# EAGLE board 4ESC v3.1 (EAGLE 6.5.0), part 1 of 2
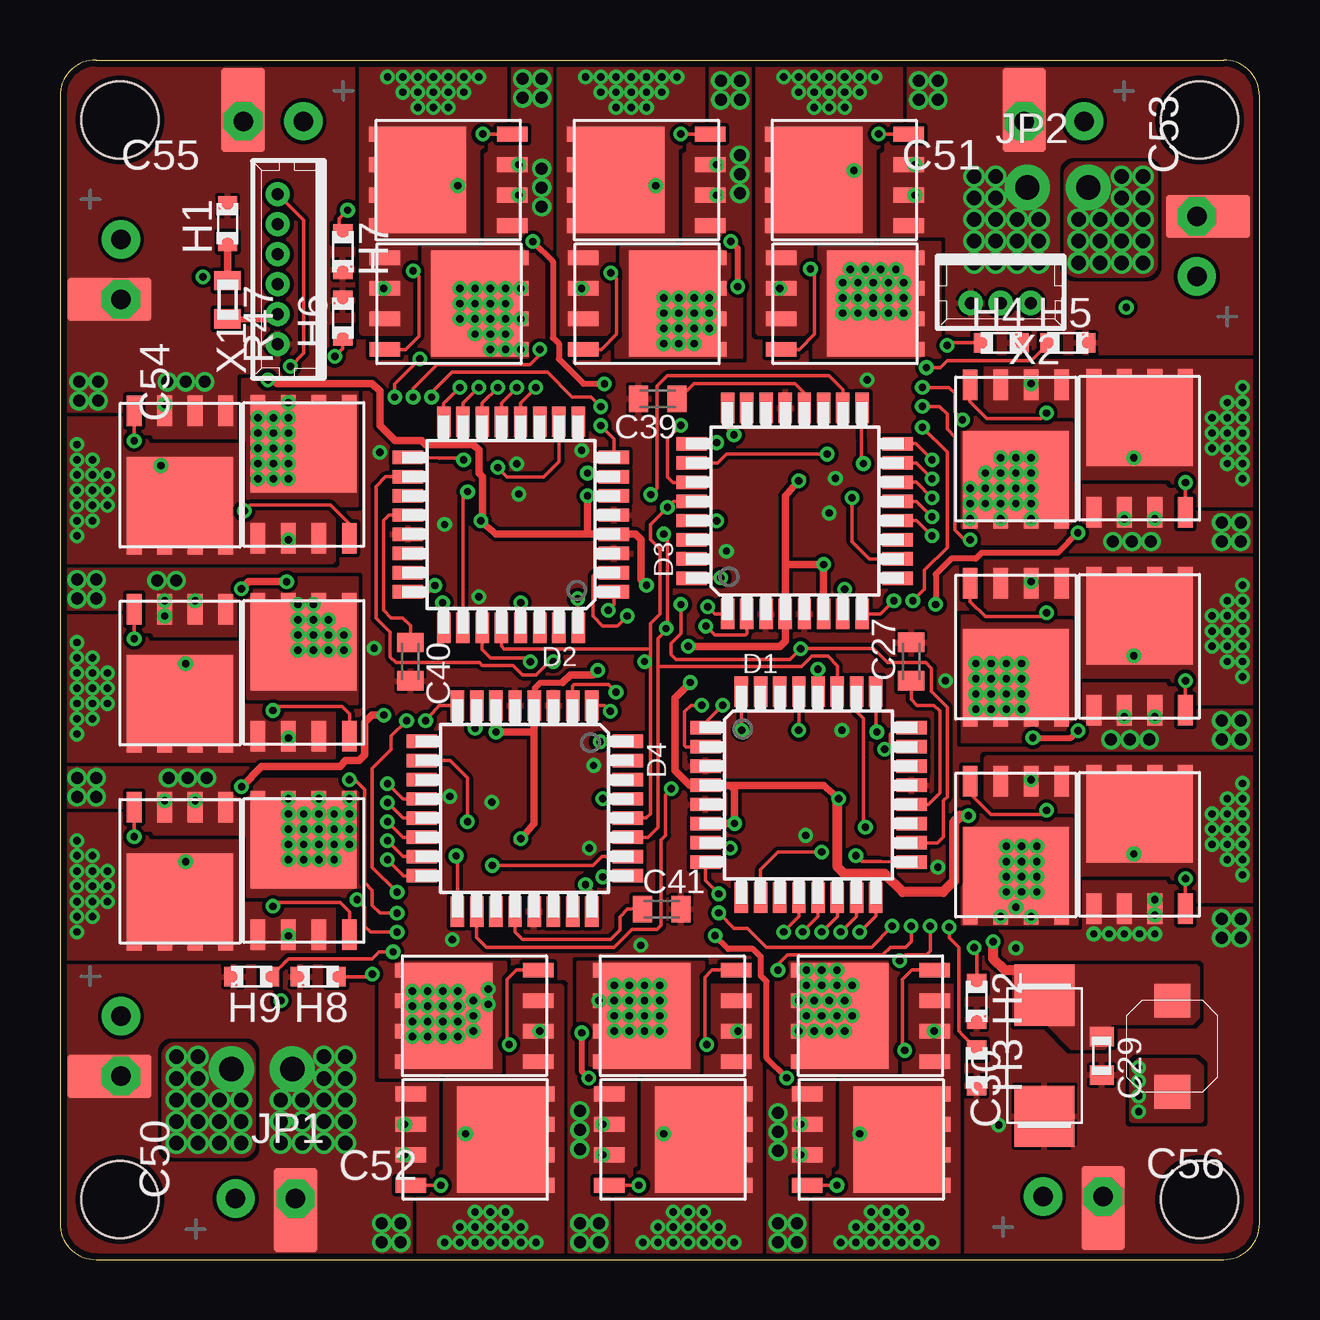
[diagram p0: board, top side]
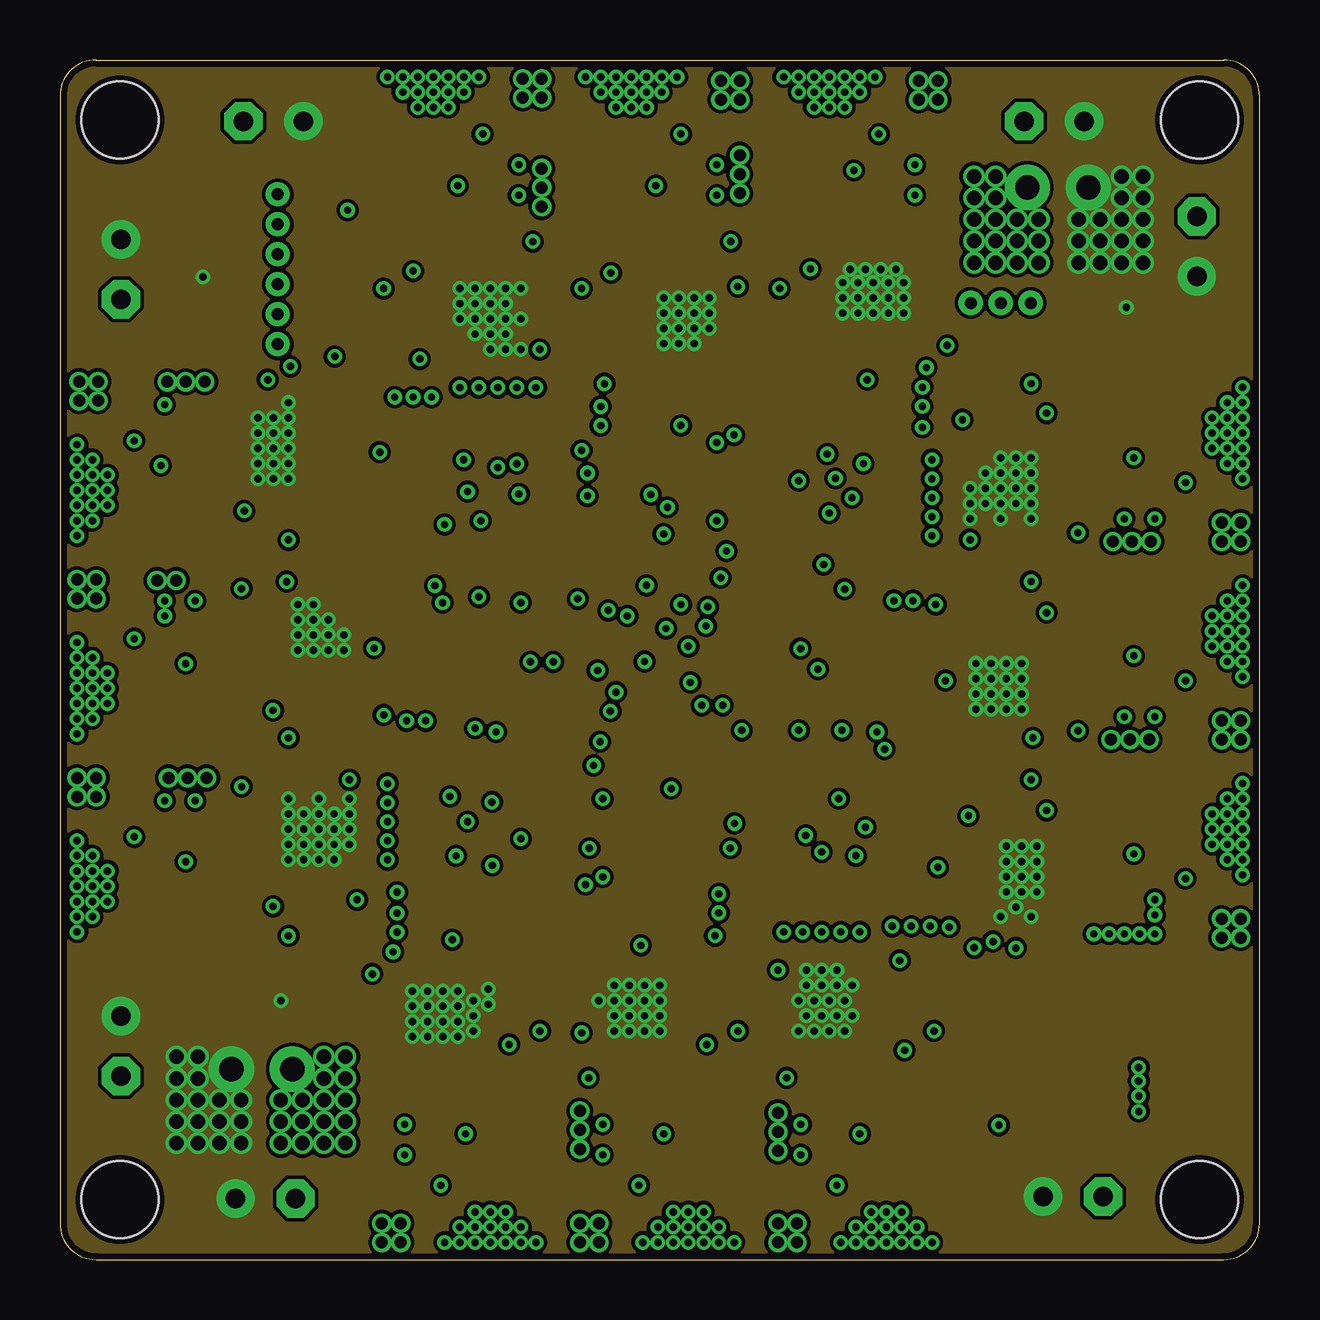
[diagram p1: board, inner layer Route2]
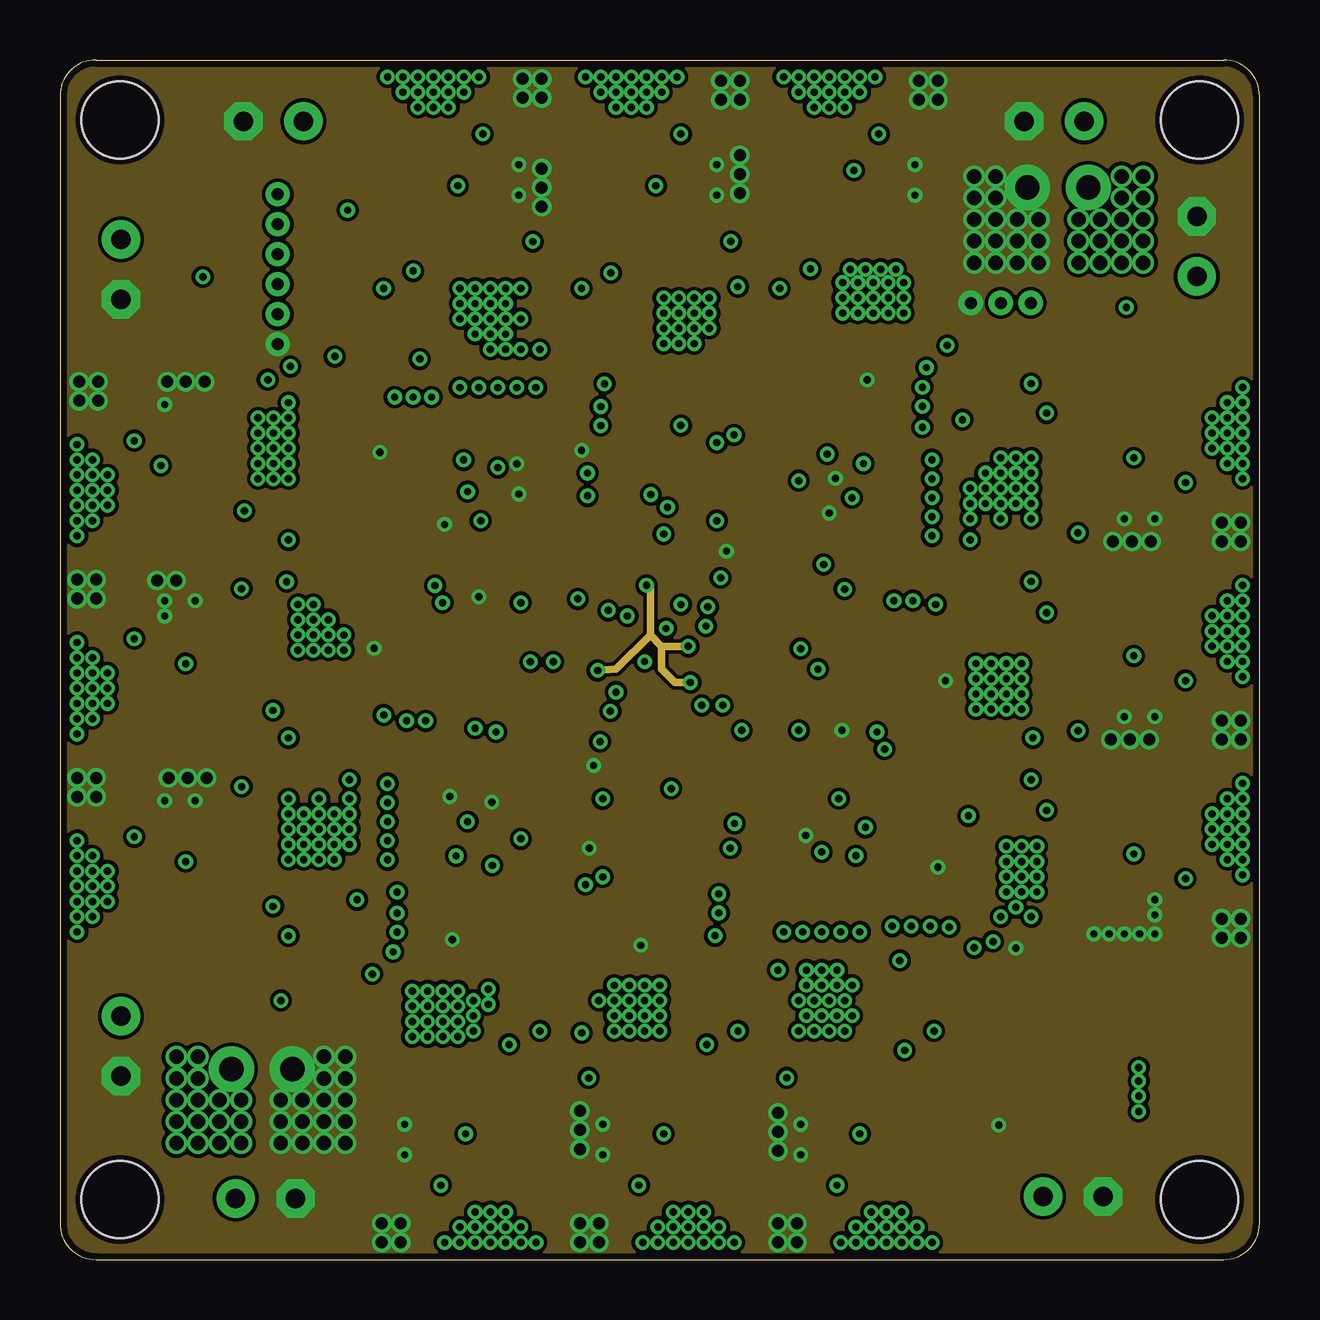
[diagram p2: board, inner layer Route15]
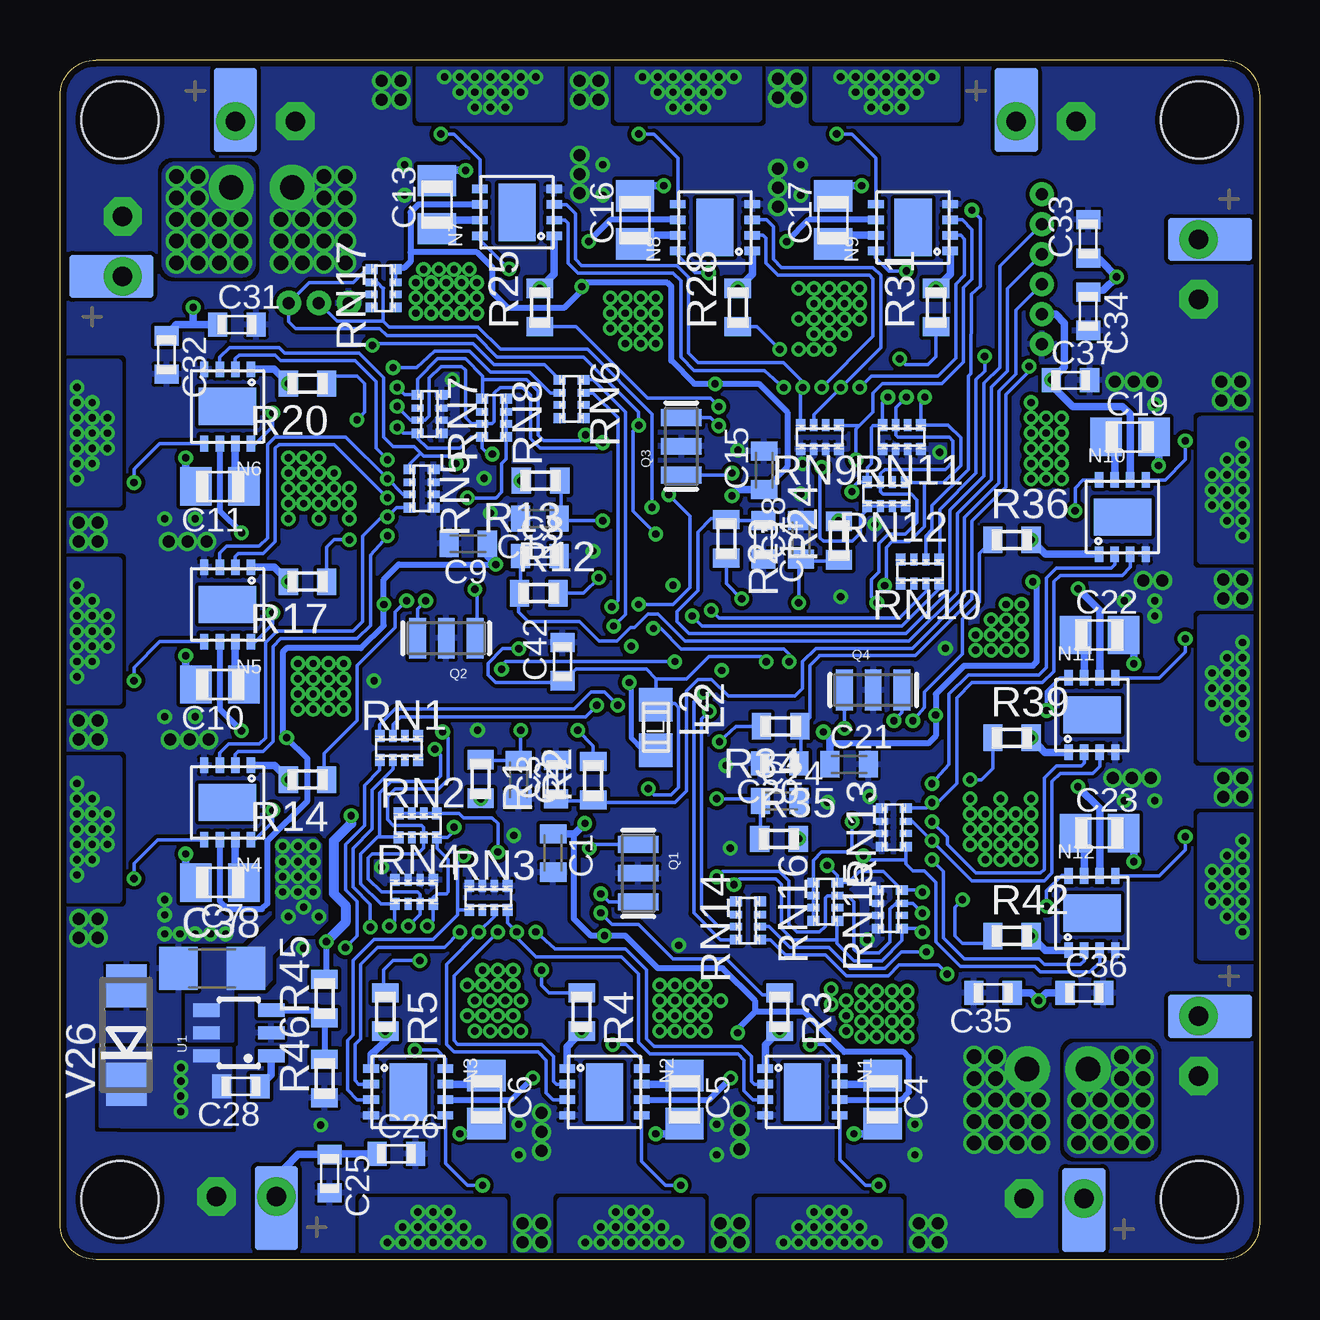
[diagram p3: board, bottom side, seen from below]

Size 50 x 50 mm. Coordinates in mm from the lower left corner, seen from the top.
Outline: 1.5,50 48.5,50 arc-90 50,48.5 50,1.5 arc-90 48.5,0 1.5,0 arc-90 0,1.5 0,48.5 arc-90 1.5,50
Copper layers (1*2*15*16): Top 0.035mm / dielectric 0.48mm / Route2 0.035mm / dielectric 0.48mm / Route15 0.035mm / dielectric 0.48mm / Bottom 0.035mm
Design rules "ITEADstudio_CAM for Eagle6_4Layer.x": minimum track width 6mil, minimum drill 12mil, track to track 6mil, track to pad 6mil, pad to pad 6mil, via to via 6mil, smd to smd 0mil, copper to edge 10mil, drill to drill 10mil, minimum pad ring 10mil, minimum via ring 6mil, stop-mask expansion 2mil, vias tented up to drill 100mil, thermal gap 0.125mm
Holes 3.2 mm at 2.5,2.5 2.5,47.5 47.5,2.5 47.5,47.5

## Footprints (pad centres in the part's own frame; a part is rotated, then mirrored left to right if it is on the bottom)
C0603K = smd 0.8 x 1.1: 1 -0.8,0; 2 0.8,0
C0603K' = smd 0.8 x 1: 1 -0.8,0; 2 0.8,0
C0805K = smd 1.3 x 1.6: 1 -1,0; 2 1,0
C/6032-28R = smd 2.55 x 2.5: + 2.525,0; - -2.525,0
C1206 = smd 1.6 x 1.8: 1 -1.4,0; 2 1.4,0
ELKO_MARTINEZ = drill 0.813 pad 1.6: + -1.25,1.27 | smd 1.8 x 3.5 bottom: +1 -1.25,0.8 | drill 0.813 pad 1.6 octagon: - 1.25,1.27 | smd 1.8 x 3.5: -1 1.25,0.8
TQFP32-08 = smd 1.27 x 0.559: 1 -4.293,2.8; 2 -4.293,2; 3 -4.293,1.2; 4 -4.293,0.4; 5 -4.293,-0.4; 6 -4.293,-1.2; 7 -4.293,-2; 8 -4.293,-2.8; 17 4.293,-2.8; 18 4.293,-2; 19 4.293,-1.2; 20 4.293,-0.4; 21 4.293,0.4; 22 4.293,1.2; 23 4.293,2; 24 4.293,2.8 | smd 0.559 x 1.27: 9 -2.8,-4.293; 10 -2,-4.293; 11 -1.2,-4.293; 12 -0.4,-4.293; 13 0.4,-4.293; 14 1.2,-4.293; 15 2,-4.293; 16 2.8,-4.293; 25 2.8,4.293; 26 2,4.293; 27 1.2,4.293; 28 0.4,4.293; 29 -0.4,4.293; 30 -1.2,4.293; 31 -2,4.293; 32 -2.8,4.293
CHIPLED_0603 = smd 0.8 x 0.8: A 0,-0.75; C 0,0.75
1X02_NO_SILK = drill 1.016 pad 1.88: 1 0,0; 2 2.54,0
CDRH4D28 = smd 1.4 x 1.5: P$1 -1.9,0; P$2 1.9,0
L0805 = smd 1.397 x 1.397: 1 -0.953,0; 2 0.953,0
DFN3X3P8 = smd 0.35 x 0.65: 1 -0.975,-1.55; 2 -0.325,-1.55; 3 0.325,-1.55; 4 0.975,-1.55; 5 0.975,1.55; 6 0.325,1.55; 7 -0.325,1.55; 8 -0.975,1.55 | smd 2.4 x 1.55: 9 0,0
RESONATOR-SMD = smd 0.7 x 1.7: 1 -1.2,0; 2 0,0; 3 1.2,0
R0603 = smd 0.8 x 1.1: 1 -0.8,0; 2 0.8,0
4X0402ARV341 = smd 0.4 x 0.5: 1 -0.8,-0.5; 4 0.8,-0.5; 5 0.8,0.5; 8 -0.8,0.5 | smd 0.3 x 0.5: 2 -0.25,-0.5; 3 0.25,-0.5; 6 0.25,0.5; 7 -0.25,0.5
SOT23-6 = smd 0.55 x 1.1: 1 -0.95,-1.35; 2 0,-1.35; 3 0.95,-1.35; 4 0.95,1.35; 5 0,1.35; 6 -0.95,1.35
POWER56 = smd 0.61 x 1.27: P$1 -1.905,-2.67; P$2 -0.635,-2.67; P$3 0.635,-2.67; P$4 1.905,-2.67; P$5 1.905,2.67; P$6 0.635,2.67; P$7 -0.635,2.67; P$8 -1.905,2.67 | smd 4.423 x 3.7: P$9 0,1.1
DO214AC = smd 1.8 x 1.7: A 2.05,0; C -2.05,0
53047-06 = drill 0.5 pad 0.698: 1 3.125,0.45; 2 1.875,0.45; 3 0.625,0.45; 4 -0.625,0.45; 5 -1.875,0.45; 6 -3.125,0.45
53047-03 = drill 0.5 pad 0.698: 1 1.25,0.45; 2 0,0.45; 3 -1.25,0.45

## Placement (x,y rotation side)
C1  100n  [C0603K]  29.45,16.94 270 bottom
C2  100n  [C0603K]  30.89,20 270 bottom
C3  470p  [C0603K']  29.33,20 90 bottom
C4  1u50V  [C0805K]  15.71,6.67 270 bottom
C5  1u50V  [C0805K]  23.97,6.67 270 bottom
C6  1u50V  [C0805K]  32.22,6.67 270 bottom
C7  1u50V  [C0805K]  43.33,15.71 180 bottom
C8  470p  [C0603K']  30,29.33 0 bottom
C9  100n  [C0603K]  32.99,29.84 180 bottom
C10  1u50V  [C0805K]  43.33,23.97 180 bottom
C11  1u50V  [C0805K]  43.33,32.22 180 bottom
C12  100n  [C0603K]  30,30.89 180 bottom
C13  1u50V  [C0805K]  34.29,43.97 90 bottom
C14  470p  [C0603K']  20.67,30 270 bottom
C15  100n  [C0603K]  20.65,32.9 90 bottom
C16  1u50V  [C0805K]  26.03,43.33 90 bottom
C17  1u50V  [C0805K]  17.78,43.33 90 bottom
C18  100n  [C0603K]  19.11,30 90 bottom
C19  1u50V  [C0805K]  5.4,34.29 0 bottom
C20  470p  [C0603K']  20,20.67 180 bottom
C21  100n  [C0603K]  17.11,20.64 0 bottom
C22  1u50V  [C0805K]  6.67,26.03 0 bottom
C23  1u50V  [C0805K]  6.67,17.78 0 bottom
C24  100n  [C0603K]  20,19.11 0 bottom
C25  100n  [C0603K']  38.76,3.58 270 bottom
C26  100n  [C0603K']  35.98,4.41 0 bottom
C27  100n  [C0603K]  35.48,24.93 90 top
C28  100n  [C0603K']  42.47,7.22 180 bottom
C29  100n  [C0603K']  43.42,8.49 270 top
C30  47u 10V  [C/6032-28R]  41.04,8.49 90 top
C31  100n  [C0603K']  42.62,38.97 0 bottom
C32  100n  [C0603K']  45.56,37.7 270 bottom
C33  100n  [C0603K']  7.14,42.55 90 bottom
C34  100n  [C0603K']  7.14,39.53 270 bottom
C35  100n  [C0603K']  11.11,11.11 180 bottom
C36  100n  [C0603K']  7.3,11.11 0 bottom
C37  100n  [C0603K']  7.88,36.65 0 bottom
C38  100n  [C1206]  43.66,12.14 0 bottom
C39  100n  [C0603K]  24.92,35.88 180 top
C40  100n  [C0603K]  14.61,24.92 270 top
C41  100n  [C0603K]  25.08,14.61 0 top
C42  100n  [C0603K']  29.05,24.92 90 bottom
C50  150µ35V1  [ELKO_MARTINEZ]  1.27,8.89 270 top
C51  150µ35V1  [ELKO_MARTINEZ]  41.43,48.72 180 top
C52  150µ35V1  [ELKO_MARTINEZ]  8.57,1.27 0 top
C53  150µ35V1  [ELKO_MARTINEZ]  48.66,42.23 90 top
C54  150µ35V1  [ELKO_MARTINEZ]  1.27,41.27 270 top
C55  150µ35V1  [ELKO_MARTINEZ]  8.89,48.72 180 top
C56  150µ35V1  [ELKO_MARTINEZ]  42.23,1.35 0 top
D1  MEGA8-AI  [TQFP32-08]  31.2,19.37 0 top
D2  MEGA8-AI  [TQFP32-08]  18.8,30.63 180 top
D3  MEGA8-AI  [TQFP32-08]  30.63,31.2 90 top
D4  MEGA8-AI  [TQFP32-08]  19.37,18.8 270 top
H1  blue  [CHIPLED_0603]  6.99,43.18 0 top
H2  GREEN  [CHIPLED_0603]  38.21,10.76 180 top
H3  RED  [CHIPLED_0603]  38.21,7.99 180 top
H4  GREEN  [CHIPLED_0603]  39.24,38.21 270 top
H5  RED  [CHIPLED_0603]  42.02,38.21 270 top
H6  GREEN  [CHIPLED_0603]  11.79,39.24 0 top
H7  RED  [CHIPLED_0603]  11.79,42.02 180 top
H8  GREEN  [CHIPLED_0603]  10.76,11.79 90 top
H9  RED  [CHIPLED_0603]  7.99,11.79 90 top
JP1  [1X02_NO_SILK]  9.68,7.94 180 top
JP2  [1X02_NO_SILK]  40.32,44.69 0 top
L1  15uH 1A  [CDRH4D28]  46.35,8.89 90 top
L2  4.7uH  [L0805]  25.16,22.18 270 bottom
N1  MCP14700  [DFN3X3P8]  19.05,6.99 270 bottom
N2  MCP14700  [DFN3X3P8]  27.3,6.99 270 bottom
N3  MCP14700  [DFN3X3P8]  35.48,6.99 270 bottom
N4  MCP14700  [DFN3X3P8]  43.02,19.05 180 bottom
N5  MCP14700  [DFN3X3P8]  43.02,27.3 180 bottom
N6  MCP14700  [DFN3X3P8]  43.02,35.56 180 bottom
N7  MCP14700  [DFN3X3P8]  30.95,43.65 90 bottom
N8  MCP14700  [DFN3X3P8]  22.7,43.02 90 bottom
N9  MCP14700  [DFN3X3P8]  14.44,43.02 90 bottom
N10  MCP14700  [DFN3X3P8]  5.71,30.95 0 bottom
N11  MCP14700  [DFN3X3P8]  6.99,22.7 0 bottom
N12  MCP14700  [DFN3X3P8]  6.99,14.44 0 bottom
Q1  16mhz  [RESONATOR-SMD]  25.9,16.1 270 bottom
Q2  16mhz  [RESONATOR-SMD]  33.9,25.9 180 bottom
Q3  16mhz  [RESONATOR-SMD]  24.1,33.9 90 bottom
Q4  16mhz  [RESONATOR-SMD]  16.1,23.74 0 bottom
R1  10k  [R0603]  32.47,20.03 270 bottom
R2  220R  [R0603]  27.78,19.96 90 bottom
R3  18k  [R0603]  20,10.32 270 bottom
R4  18k  [R0603]  28.26,10.32 270 bottom
R5  18k  [R0603]  36.44,10.32 270 bottom
R12  220R  [R0603]  30.04,27.78 0 bottom
R13  10k  [R0603]  29.97,32.47 180 bottom
R14  18k  [R0603]  39.68,20 180 bottom
R17  18k  [R0603]  39.68,28.26 180 bottom
R20  18k  [R0603]  39.68,36.51 180 bottom
R23  220R  [R0603]  22.22,30.04 270 bottom
R24  10k  [R0603]  17.53,29.97 90 bottom
R25  18k  [R0603]  30,39.68 90 bottom
R28  18k  [R0603]  21.74,39.68 90 bottom
R31  18k  [R0603]  13.49,39.68 90 bottom
R34  220R  [R0603]  19.96,22.22 180 bottom
R35  10k  [R0603]  20.03,17.53 0 bottom
R36  18k  [R0603]  10.32,30 0 bottom
R39  18k  [R0603]  10.32,21.74 0 bottom
R42  18k  [R0603]  10.32,13.49 0 bottom
R45  5k6  [R0603]  38.97,10.87 90 bottom
R46  1k  [R0603]  38.97,7.54 90 bottom
R47  330R  [R0603]  6.99,40.01 270 top
RN1  560R  [4X0402ARV341]  35.87,21.33 180 bottom
RN2  3k3  [4X0402ARV341]  35.08,18.1 180 bottom
RN3  10k  [4X0402ARV341]  32.15,15.08 180 bottom
RN4  3k3  [4X0402ARV341]  35.24,15.32 180 bottom
RN5  10k  [4X0402ARV341]  34.92,32.15 90 bottom
RN6  560R  [4X0402ARV341]  28.67,35.87 90 bottom
RN7  3k3  [4X0402ARV341]  34.6,35.24 90 bottom
RN8  3k3  [4X0402ARV341]  31.9,35.08 90 bottom
RN9  10k  [4X0402ARV341]  18.33,34.28 0 bottom
RN10  560R  [4X0402ARV341]  14.15,28.67 0 bottom
RN11  3k3  [4X0402ARV341]  14.92,34.28 0 bottom
RN12  3k3  [4X0402ARV341]  15.55,31.9 0 bottom
RN13  10k  [4X0402ARV341]  15.24,18.01 270 bottom
RN14  560R  [4X0402ARV341]  21.33,14.13 270 bottom
RN15  3k3  [4X0402ARV341]  15.4,14.6 270 bottom
RN16  3k3  [4X0402ARV341]  18.1,14.92 270 bottom
RN17  10k  [4X0402ARV341]  36.51,40.48 270 bottom
U1  LM2842  [SOT23-6]  42.55,9.45 90 bottom
U$1  M  [M]  24.92,26.75 0 top
U$2  M  [M]  27.78,4.13 0 bottom
U$3  4ESC_05MM  [4ESC_05MM_HOCH]  49.21,8.73 90 top
U$4  4ESC_05MM  [4ESC_05MM_HOCH]  20.32,3.49 0 bottom
V1  FDMS7660  [POWER56]  17.27,10.16 90 top
V2  FDMS7660  [POWER56]  17.3,5 270 top
V3  FDMS7660  [POWER56]  25.53,10.16 90 top
V4  FDMS7660  [POWER56]  25.56,5 270 top
V5  FDMS7660  [POWER56]  33.78,10.16 90 top
V6  FDMS7660  [POWER56]  33.81,5 270 top
V7  FDMS7660  [POWER56]  39.84,17.27 180 top
V8  FDMS7660  [POWER56]  45,17.3 0 top
V9  FDMS7660  [POWER56]  39.84,25.53 180 top
V10  FDMS7660  [POWER56]  45,25.56 0 top
V11  FDMS7660  [POWER56]  39.84,33.78 180 top
V12  FDMS7660  [POWER56]  45,33.81 0 top
V13  FDMS7660  [POWER56]  32.73,39.84 270 top
V14  FDMS7660  [POWER56]  32.7,45 90 top
V15  FDMS7660  [POWER56]  24.47,39.84 270 top
V16  FDMS7660  [POWER56]  24.44,45 90 top
V17  FDMS7660  [POWER56]  16.22,39.84 270 top
V18  FDMS7660  [POWER56]  16.19,45 90 top
V19  FDMS7660  [POWER56]  10.16,32.73 0 top
V20  FDMS7660  [POWER56]  5,32.7 180 top
V21  FDMS7660  [POWER56]  10.16,24.47 0 top
V22  FDMS7660  [POWER56]  5,24.44 180 top
V23  FDMS7660  [POWER56]  10.16,16.22 0 top
V24  FDMS7660  [POWER56]  5,16.19 180 top
V26  SS14  [DO214AC]  47.23,9.36 90 bottom
X1  53047-06  [53047-06]  9.53,41.27 90 top
X2  53047-03  [53047-03]  39.21,40.32 180 top

## Library data of the parts
C1 C2 C9 C12 C15 C18 C21 C24 C27 C39-C41 R1-R5 R12-R14 R17 R20 R23-R25 R28 R31 R34-R36 R39 R42 = resistor
C3-C8 C10 C11 C13 C14 C16 C17 C19 C20 C22 C23 C25 C26 C28-C38 C42 C50-C56 R45-R47 = rcl
D1-D4 = atmel; MPN: ATMEGA8-16AU; OC_FARNELL: 9171371; OC_NEWARK: 73M8863
H1-H9 = led
JP1 JP2 Q1-Q4 V1-V24 = SparkFun
L1 = spulen-martinez
L2 = divers
N1-N12 = microchip
RN1-RN17 = resistor-dil; OC_FARNELL: unknown; OC_NEWARK: unknown
U1 = texas
U$1-U$4 = Zeichen
V26 = diode
X1 = con-molex; MPN: 53047-0610-C; OC_FARNELL: 9733078; OC_NEWARK: 03M2965
X2 = con-molex; MPN: 530470310; OC_FARNELL: 9732853; OC_NEWARK: 14R5412

## Nets
+5V: C1.1 C9.1 C15.1 C21.1 C29.1 C30.+ C37.1 D1.4 D1.6 D2.4 D2.6 D3.4 D3.6 D4.4 D4.6 L1.P$2 L2.2 N1.6 N2.6 N3.6 N4.6 N5.6 N6.6 N7.6 N8.6 N9.6 N10.6 N11.6 N12.6 R1.2 R13.2 R24.2 R35.2 R45.2 R47.2 RN17.7 RN17.8 X1.5
A+_1: D1.12 N1.2
A+_2: D3.12 N4.2
A+_3: D2.12 N7.2
A+_4: D4.12 N10.2
A-_1: D1.13 N1.3 RN3.8
A-_2: D3.13 N4.3 RN5.8
A-_3: D2.13 N7.3 RN9.8
A-_4: D4.13 N10.3 RN13.8
A_5V: C42.1 D1.18 D2.18 D3.18 D4.18 L2.1
B+_1: D1.14 N2.2
B+_2: D3.14 N5.2
B+_3: D2.14 N8.2
B+_4: D4.14 N11.2
B-_1: D1.15 N2.3 RN3.7
B-_2: D3.15 N5.3 RN5.7
B-_3: D2.15 N8.3 RN9.7
B-_4: D4.15 N11.3 RN13.7
C+_1: D1.16 N3.2
C+_2: D3.16 N6.2
C+_3: D2.16 N9.2
C+_4: D4.16 N12.2
C-_1: D1.17 N3.3 RN3.5
C-_2: D3.17 N6.3 RN5.5
C-_3: D2.17 N9.3 RN9.5
C-_4: D4.17 N12.3 RN13.5
GND: C1.2 C2.2 C3.2 C8.2 C9.2 C12.2 C14.2 C15.2 C18.2 C20.2 C21.2 C24.2 C25.2 C26.2 C27.2 C29.2 C30.- C31.2 C32.2 C33.2 C34.2 C35.2 C36.2 C37.2 C38.1 C39.2 C40.2 C41.2 C42.2 C50.- C50.-1 C51.- C51.-1 C52.- C52.-1 C53.- C53.-1 C54.- C54.-1 C55.- C55.-1 C56.- C56.-1 D1.3 D1.5 D1.21 D2.3 D2.5 D2.21 D3.3 D3.5 D3.21 D4.3 D4.5 D4.21 H1.C H2.C H3.C H4.C H5.C H6.C H7.C H8.C H9.C JP1.1 JP2.1 N1.4 N2.4 N3.4 N4.4 N5.4 N6.4 N7.4 N8.4 N9.4 N10.4 N11.4 N12.4 Q1.2 Q2.2 Q3.2 Q4.2 R46.1 RN3.1 RN3.2 RN3.3 RN3.4 RN4.1 RN4.2 RN4.3 RN4.4 RN5.1 RN5.2 RN5.3 RN5.4 RN7.1 RN7.2 RN7.3 RN7.4 RN9.1 RN9.2 RN9.3 RN9.4 RN11.1 RN11.2 RN11.3 RN11.4 RN13.1 RN13.2 RN13.3 RN13.4 RN15.1 RN15.2 RN15.3 RN15.4 U1.2 V2.P$1 V2.P$2 V2.P$3 V4.P$1 V4.P$2 V4.P$3 V6.P$1 V6.P$2 V6.P$3 V8.P$1 V8.P$2 V8.P$3 V10.P$1 V10.P$2 V10.P$3 V12.P$1 V12.P$2 V12.P$3 V14.P$1 V14.P$2 V14.P$3 V16.P$1 V16.P$2 V16.P$3 V18.P$1 V18.P$2 V18.P$3 V20.P$1 V20.P$2 V20.P$3 V22.P$1 V22.P$2 V22.P$3 V24.P$1 V24.P$2 V24.P$3 V26.A X1.6 X2.1
GREEN_LED_1: D1.2 RN1.4
GREEN_LED_2: D3.2 RN6.4
GREEN_LED_3: D2.2 RN10.4
GREEN_LED_4: D4.2 RN14.4
MOTOR-A_1: C4.2 N1.1 R3.2 V1.P$1 V1.P$2 V1.P$3 V2.P$5 V2.P$6 V2.P$7 V2.P$8 V2.P$9
MOTOR-A_2: C7.2 N4.1 R14.2 V7.P$1 V7.P$2 V7.P$3 V8.P$5 V8.P$6 V8.P$7 V8.P$8 V8.P$9
MOTOR-A_3: C13.2 N7.1 R25.2 V13.P$1 V13.P$2 V13.P$3 V14.P$5 V14.P$6 V14.P$7 V14.P$8 V14.P$9
MOTOR-A_4: C19.2 N10.1 R36.2 V19.P$1 V19.P$2 V19.P$3 V20.P$5 V20.P$6 V20.P$7 V20.P$8 V20.P$9
MOTOR-B_1: C5.2 N2.1 R4.2 V3.P$1 V3.P$2 V3.P$3 V4.P$5 V4.P$6 V4.P$7 V4.P$8 V4.P$9
MOTOR-B_2: C10.2 N5.1 R17.2 V9.P$1 V9.P$2 V9.P$3 V10.P$5 V10.P$6 V10.P$7 V10.P$8 V10.P$9
MOTOR-B_3: C16.2 N8.1 R28.2 V15.P$1 V15.P$2 V15.P$3 V16.P$5 V16.P$6 V16.P$7 V16.P$8 V16.P$9
MOTOR-B_4: C22.2 N11.1 R39.2 V21.P$1 V21.P$2 V21.P$3 V22.P$5 V22.P$6 V22.P$7 V22.P$8 V22.P$9
MOTOR-C_1: C6.2 N3.1 R5.2 V5.P$1 V5.P$2 V5.P$3 V6.P$5 V6.P$6 V6.P$7 V6.P$8 V6.P$9
MOTOR-C_2: C11.2 N6.1 R20.2 V11.P$1 V11.P$2 V11.P$3 V12.P$5 V12.P$6 V12.P$7 V12.P$8 V12.P$9
MOTOR-C_3: C17.2 N9.1 R31.2 V17.P$1 V17.P$2 V17.P$3 V18.P$5 V18.P$6 V18.P$7 V18.P$8 V18.P$9
MOTOR-C_4: C23.2 N12.1 R42.2 V23.P$1 V23.P$2 V23.P$3 V24.P$5 V24.P$6 V24.P$7 V24.P$8 V24.P$9
MUXA_1: D1.26 R3.1 RN2.8 RN4.8
MUXA_2: D3.26 R14.1 RN7.8 RN8.8
MUXA_3: D2.26 R25.1 RN11.8 RN12.8
MUXA_4: D4.26 R36.1 RN15.8 RN16.8
MUXB_1: D1.25 R4.1 RN2.7 RN4.7
MUXB_2: D3.25 R17.1 RN7.7 RN8.7
MUXB_3: D2.25 R28.1 RN11.7 RN12.7
MUXB_4: D4.25 R39.1 RN15.7 RN16.7
MUXC_1: D1.24 R5.1 RN2.5 RN4.5
MUXC_2: D3.24 R20.1 RN7.5 RN8.5
MUXC_3: D2.24 R31.1 RN11.5 RN12.5
MUXC_4: D4.24 R42.1 RN15.5 RN16.5
N$1: N1.5 V2.P$4
N$2: N2.5 V4.P$4
N$2_1: D1.8 Q1.3
N$2_2: D3.8 Q2.3
N$2_3: D2.8 Q3.3
N$2_4: D4.8 Q4.3
N$3: N3.5 V6.P$4
N$3_1: D1.7 Q1.1
N$3_2: D3.7 Q2.1
N$3_3: D2.7 Q3.1
N$3_4: D4.7 Q4.1
N$4: H3.A RN1.6
N$5: H2.A RN1.5
N$6: N4.5 V8.P$4
N$7: C40.1 D2.20
N$8: C27.1 D1.20
N$9: N5.5 V10.P$4
N$10: D1.9
N$11: D1.23
N$12: D1.22
N$13: D1.19
N$14: N6.5 V12.P$4
N$15: D1.30
N$16: H4.A RN6.5
N$16_1: N1.8 V1.P$4
N$16_2: N2.8 V3.P$4
N$16_3: N3.8 V5.P$4
N$16_4: N4.8 V7.P$4
N$16_5: N5.8 V9.P$4
N$16_6: N6.8 V11.P$4
N$16_7: N7.8 V13.P$4
N$16_8: N8.8 V15.P$4
N$16_9: N9.8 V17.P$4
N$16_10: N10.8 V19.P$4
N$16_11: N11.8 V21.P$4
N$16_12: N12.8 V23.P$4
N$17: C39.1 D3.20
N$18: D1.31
N$19: D1.11
N$20: C28.2 L1.P$1 U1.6 V26.C
N$21: D3.9
N$22: D3.23
N$23: D3.22
N$24: D3.19
N$25: D3.30
N$26: D3.31
N$27: D3.11
N$28: H5.A RN6.6
N$29: N7.5 V14.P$4
N$30: N8.5 V16.P$4
N$31: N9.5 V18.P$4
N$32: H6.A RN10.5
N$33: C41.1 D4.20
N$34: C28.1 U1.1
N$35: D2.9
N$36: D2.23
N$37: D2.22
N$38: D2.19
N$39: D2.30
N$40: D2.31
N$41: D2.11
N$42: H7.A RN10.6
N$43: N10.5 V20.P$4
N$44: N11.5 V22.P$4
N$45: N12.5 V24.P$4
N$46: H8.A RN14.5
N$47: R45.1 R46.2 U1.3
N$49: D4.9
N$50: D4.23
N$51: D4.22
N$52: D4.19
N$53: D4.30
N$54: D4.31
N$55: D4.11
N$56: H9.A RN14.6
N$60: H1.A R47.1
N$78_1: C4.1 N1.7
N$78_2: C5.1 N2.7
N$78_3: C6.1 N3.7
N$78_4: C7.1 N4.7
N$78_5: C10.1 N5.7
N$78_6: C11.1 N6.7
N$78_7: C13.1 N7.7
N$78_8: C16.1 N8.7
N$78_9: C17.1 N9.7
N$78_10: C19.1 N10.7
N$78_11: C22.1 N11.7
N$78_12: C23.1 N12.7
PWM_IN_1: C3.1 R2.1 X1.4
PWM_IN_2: C8.1 R12.1 X1.3
PWM_IN_3: C14.1 R23.1 X1.2
PWM_IN_4: C20.1 R34.1 X1.1
RC_IN_1: D1.32 R2.2
RC_IN_2: D3.32 R12.2
RC_IN_3: D2.32 R23.2
RC_IN_4: D4.32 R34.2
RED_LED_1: D1.1 RN1.3
RED_LED_2: D3.1 RN6.3
RED_LED_3: D2.1 RN10.3
RED_LED_4: D4.1 RN14.3
RST_1: C2.1 D1.29 R1.1
RST_2: C12.1 D3.29 R13.1
RST_3: C18.1 D2.29 R24.1
RST_4: C24.1 D4.29 R35.1
SCL: D1.28 D2.28 D3.28 D4.28 RN17.2 X2.2
SDA: D1.27 D2.27 D3.27 D4.27 RN17.1 X2.3
SENSE_STAR_1: D1.10 RN2.1 RN2.2 RN2.3 RN2.4
SENSE_STAR_2: D3.10 RN8.1 RN8.2 RN8.3 RN8.4
SENSE_STAR_3: D2.10 RN12.1 RN12.2 RN12.3 RN12.4
SENSE_STAR_4: D4.10 RN16.1 RN16.2 RN16.3 RN16.4
VCC: C25.1 C26.1 C31.1 C32.1 C33.1 C34.1 C35.1 C36.1 C38.2 C50.+ C50.+1 C51.+ C51.+1 C52.+ C52.+1 C53.+ C53.+1 C54.+ C54.+1 C55.+ C55.+1 C56.+ C56.+1 JP1.2 JP2.2 U1.4 U1.5 V1.P$5 V1.P$6 V1.P$7 V1.P$8 V1.P$9 V3.P$5 V3.P$6 V3.P$7 V3.P$8 V3.P$9 V5.P$5 V5.P$6 V5.P$7 V5.P$8 V5.P$9 V7.P$5 V7.P$6 V7.P$7 V7.P$8 V7.P$9 V9.P$5 V9.P$6 V9.P$7 V9.P$8 V9.P$9 V11.P$5 V11.P$6 V11.P$7 V11.P$8 V11.P$9 V13.P$5 V13.P$6 V13.P$7 V13.P$8 V13.P$9 V15.P$5 V15.P$6 V15.P$7 V15.P$8 V15.P$9 V17.P$5 V17.P$6 V17.P$7 V17.P$8 V17.P$9 V19.P$5 V19.P$6 V19.P$7 V19.P$8 V19.P$9 V21.P$5 V21.P$6 V21.P$7 V21.P$8 V21.P$9 V23.P$5 V23.P$6 V23.P$7 V23.P$8 V23.P$9